# EAGLE board seg_v2 (EAGLE 7.7.0)
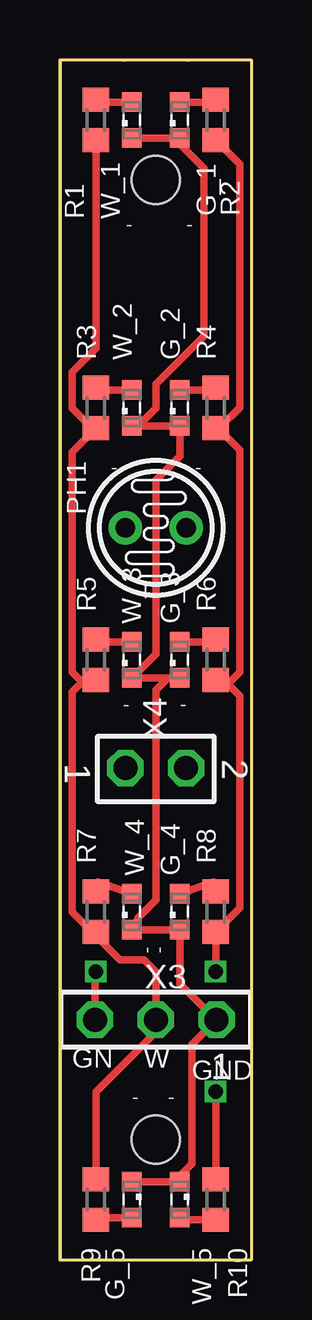
[diagram p0: board, top side]
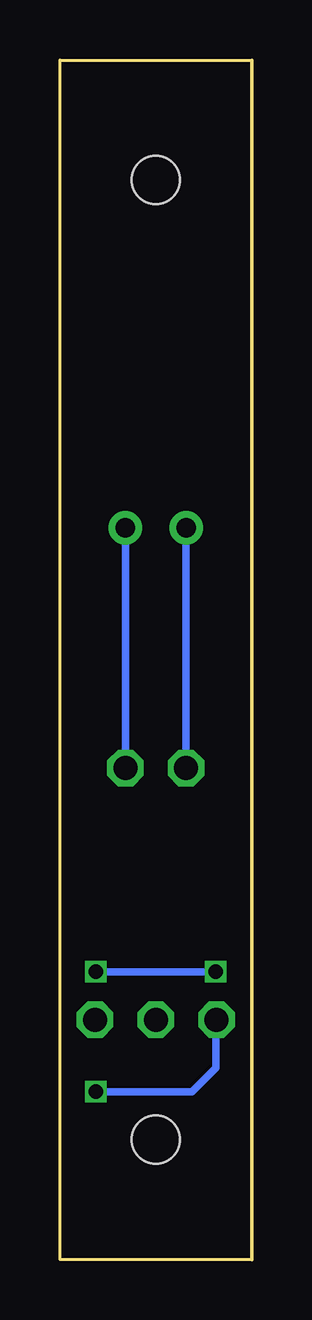
[diagram p1: board, bottom side, seen from below]

Size 8 x 50 mm. Coordinates in mm from the lower left corner, seen from the top.
Outline: 8,0 8,50 arc-1 0,50 0,0 8,0
Copper layers (1*16): Top 0.035mm / dielectric 1.5mm / Bottom 0.035mm
Design rules "SeeedStudio_2layer_DRU_no_angle_20140221": minimum track width 6mil, minimum drill 12mil, track to track 6mil, track to pad 6mil, pad to pad 6mil, via to via 6mil, smd to smd 0mil, copper to edge 10mil, drill to drill 10mil, minimum pad ring 10mil, minimum via ring 6mil, stop-mask expansion 2mil, vias tented up to drill 100mil, thermal gap 10mil
Net classes: 0 default: width 0.305 mm
Holes 2 mm at 4,45 4,5

## Footprints (pad centres in the part's own frame; a part is rotated, then mirrored left to right if it is on the bottom)
SML0603 = smd 0.8 x 0.8: A 0.75,0; C -0.75,0
TO46-VT200 = drill 0.8 pad 1.4: 1 -1.27,0; 2 1.27,0
R0603 = smd 1 x 1.1: 1 -0.85,0; 2 0.85,0
TSW-103-02-S-S = drill 1 pad 1.5 octagon: 1 2.54,0; 2 0,0; 3 -2.54,0
TSW-101-02-S-D = drill 1 pad 1.5 octagon: 1 0.02,-1.27; 2 0.02,1.27

## Placement (x,y rotation side)
G_1  [SML0603]  5,47.5 90 top
G_2  [SML0603]  5,35.5 90 top
G_3  [SML0603]  5,25 90 top
G_4  [SML0603]  5,14.5 90 top
G_5  [SML0603]  5,2.5 270 top
PH1  VT20N1  [TO46-VT200]  4,30.5 180 top
R1  [R0603]  1.5,47.5 90 top
R2  [R0603]  6.5,47.5 90 top
R3  [R0603]  1.5,35.5 90 top
R4  [R0603]  6.5,35.5 90 top
R5  [R0603]  1.5,25 90 top
R6  [R0603]  6.5,25 90 top
R7  [R0603]  1.5,14.5 90 top
R8  [R0603]  6.5,14.5 90 top
R9  [R0603]  1.5,2.5 270 top
R10  [R0603]  6.5,2.5 270 top
W_1  [SML0603]  3,47.5 90 top
W_2  [SML0603]  3,35.5 90 top
W_3  [SML0603]  3,25 90 top
W_4  [SML0603]  3,14.5 90 top
W_5  [SML0603]  3,2.5 270 top
X3  TSW-103-02-S-S  [TSW-103-02-S-S]  4,10 0 top
X4  TSW-101-02-S-D  [TSW-101-02-S-D]  4,20.5 270 top

## Library data of the parts
G_1-G_5 W_1-W_5 = led
PH1 = photo-elements
R1-R10 = rcl
X3 = con-samtec; OC_FARNELL: unknown; OC_NEWARK: unknown
X4 = con-samtec

## Nets
G_+: R2.1 R4.1 R6.1 R8.1 R10.1 X3.3
GND: G_1.C G_2.C G_3.C G_4.C G_5.C W_1.C W_2.C W_3.C W_4.C W_5.C X3.1
N$1: G_1.A R2.2
N$2: G_2.A R4.2
N$3: G_3.A R6.2
N$4: G_4.A R8.2
N$5: G_5.A R10.2
N$6: PH1.2 X4.1
N$7: PH1.1 X4.2
N$9: R1.2 W_1.A
N$10: R3.2 W_2.A
N$11: R5.2 W_3.A
N$12: R7.2 W_4.A
N$13: R9.2 W_5.A
W_+: R1.1 R3.1 R5.1 R7.1 R9.1 X3.2

## Tracks (layer width: path | path; a pad name or v marks a point on that pad's centre or on a via)
G_+  (via drill 0.6)
  Top 0.305: X3.3 1.46,11.96 v1.5,12 | v6.5,12 R8.1 7.5,14.65 7.5,23.5 6.85,24.15 R6.1 6.65,24 7,24 7.5,24.5 7.5,33.75 6.5,34.75 R4.1 7.15,35.16 7.5,35.51 7.5,45.65 R2.1 | v6.5,7 6.5,6 R10.1
  Bottom 0.305: v1.5,12 6,12 v6.5,12 | v6.5,7 2.5,7 1.5,8 1.5,9.96 X3.3
GND
  Top 0.305: W_1.C G_1.C 5,46.5 6,45.5 6,38.5 5,37.5 4,36.5 4,35.5 3,34.5 3.25,35 W_2.C G_2.C 5,33.5 4,32.5 4,25.25 W_3.C 4.5,24.25 | G_3.C 4.5,24.25 | 4.5,24.25 4,23.75 4,15 3.25,14.25 W_4.C G_4.C 5,11.5 6.5,10 X3.1 5.5,8.96 5.5,8 5.5,4 5,3.5 G_5.C W_5.C
N$1
  Top 0.305: G_1.A 6.4,48.25 R2.2
N$2
  Top 0.305: G_2.A 6.4,36.25 R4.2
N$3
  Top 0.305: G_3.A 6.4,25.75 R6.2
N$4
  Top 0.305: G_4.A 6.4,15.75 R8.2
N$5
  Top 0.305: R10.2 5.1,1.65 G_5.A
N$6
  Bottom 0.305: PH1.2 X4.1
N$7
  Bottom 0.305: PH1.1 X4.2
N$9
  Top 0.305: W_1.A 1.6,48.25 R1.2
N$10
  Top 0.305: W_2.A 1.6,36.25 R3.2
N$11
  Top 0.305: W_3.A 1.6,25.75 R5.2
N$12
  Top 0.305: W_4.A 1.6,15.75 R7.2
N$13
  Top 0.305: W_5.A 1.6,1.75 R9.2
W_+
  Top 0.305: R1.1 1.5,38 0.75,37.25 | 0.75,37.25 0.5,37 | 1.35,14 R7.1 | 1.35,14 1.35,13.65 2.5,12.5 3.5,12.5 4,12 4,11.5 X3.2 4,9.5 2,7.5 | R5.1 1,24.15 | 2,7.5 1.5,7 | 1.35,14 1,14 0.5,14.5 0.5,23.65 1,24.15 | 1,24.15 0.85,24.15 0.5,24.5 0.5,33.65 R3.1 1.35,34.65 0.5,35.5 0.5,37 | 0.5,37 0.75,37.25 | R9.1 1.5,7 | 1.5,7 2,7.5

## Text on the board
tNames: - | - | - | - | - | - | - | - | GN | W | GND | - | -